# Altium PCB PCB_test.PcbDoc
Units mm, origin at the board's own origin, x right, y up, seen from the top; angles counter-clockwise.
Board outline 70.5 x 46.6 mm, 2 copper layers (Top Layer, Bottom Layer), stack 1.171 mm thick; 66 components, 46 nets, 270 pads, 169 vias.
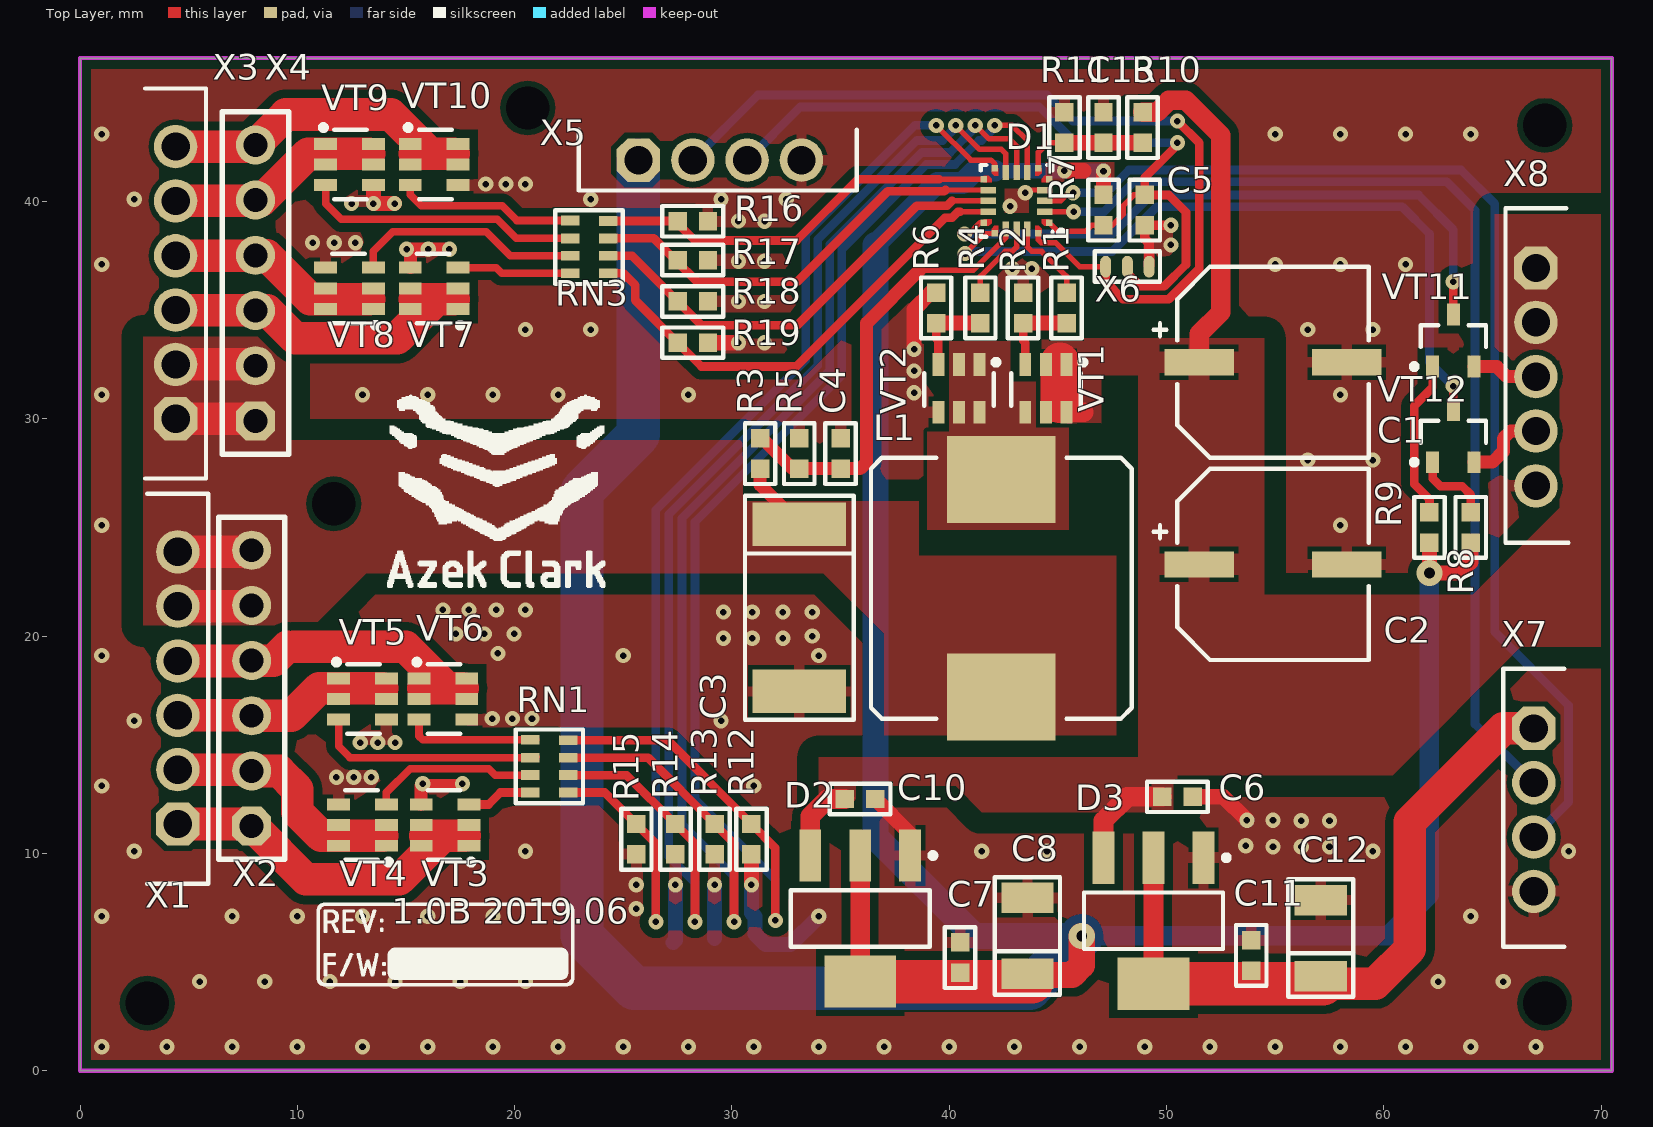
[diagram p0: Top Layer view]
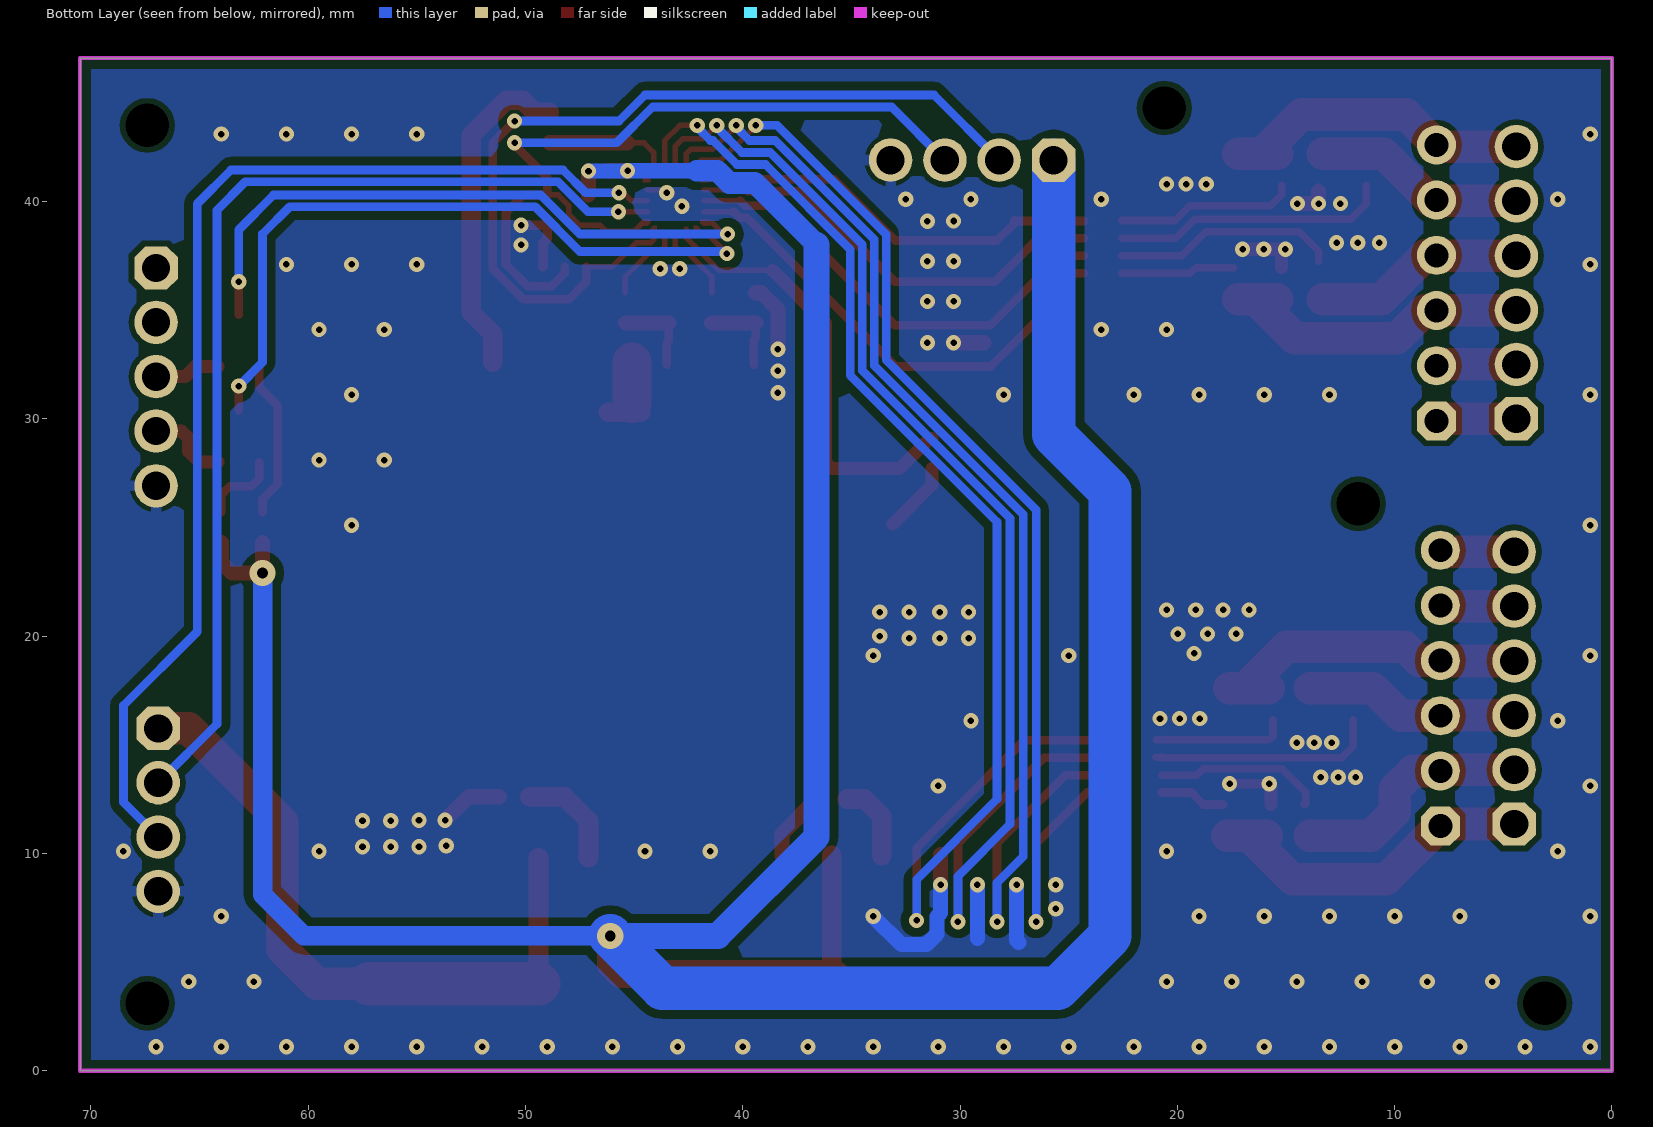
[diagram p1: Bottom Layer view, seen from below]

## Layer stack, top to bottom
Top Solder: solder mask 0.0102, Solder Resist, Dk 3.5
Top Layer: signal copper 0.0356
Dielectric 1: dielectric 1.1, FR-4, Dk 4.8
Bottom Layer: signal copper 0.0356
Bottom Solder: solder mask 0.0102, Solder Resist, Dk 3.5

## Board outline
0,0 70.5,0 70.5,46.6 0,46.6

## Design rules (kind name [scope] priority, off if disabled: settings)
BoardOutlineClearance [All] p1: gap=0.3 ignorepadtopadclearanceinfootprint=FALSE
Clearance Clearance_2 [InNamedPolygon('TOP_VCC33')] p1: gap=0.2 ignorepadtopadclearanceinfootprint=FALSE
Clearance Clearance_1 [InNamedPolygon('TOP_LED_VT')] p2: gap=0.2 ignorepadtopadclearanceinfootprint=FALSE
Clearance Clearance_NPTH [All vs InPadClass('NPTH')] p3: gap=0.4 ignorepadtopadclearanceinfootprint=FALSE except(0: Arc-Hole Track-Hole SMDPad-Hole THPad-Hole Via-Hole Fill-Hole Poly-Hole Region-Hole Text-Hole)
Clearance Clearance_MultiLayerPad [OnLayer('Multi-Layer') and IsPad] p4: gap=0.25 ignorepadtopadclearanceinfootprint=FALSE except(0: Arc-Hole Track-Hole SMDPad-Hole THPad-Hole Via-Hole Fill-Hole Poly-Hole Region-Hole Text-Hole)
Clearance Clearance_Polygon [InPolygon] p5: gap=0.4 ignorepadtopadclearanceinfootprint=FALSE except(0: Arc-Hole Track-Hole SMDPad-Hole THPad-Hole Via-Hole Fill-Hole Poly-Hole Region-Hole Text-Hole; 1: Poly-Poly)
Clearance [All] p6: gap=0.15 ignorepadtopadclearanceinfootprint=FALSE except(0: Arc-Hole Track-Hole SMDPad-Hole THPad-Hole Via-Hole Fill-Hole Poly-Hole Region-Hole Text-Hole)
Height [All] p1: minheight=0 maxheight=60 prefheight=12.7
HoleSize [All] p1: absolutevalues=TRUE maxlimit=5 minlimit=0.025 maxpercent=80.000 minpercent=20.000
HoleToHoleClearance [All] p1: gap=0.2 allowstackedmicrovias=TRUE
MinimumSolderMaskSliver [All] p1: minsoldermaskwidth=0.05
PlaneClearance [All] p1: clearance=0.5
PlaneConnect [All] p1: planeconnectstyle=Relief reliefexpansion=0.5 reliefentries=4 reliefconductorwidth=0.3 reliefairgap=0.2
PolygonConnect PolygonConnect_5 [All vs IsNamedPolygon('TOP_LED_VCC')] p1: thpad.connectstyle=Direct thpad.reliefconductorwidth=0.254 thpad.reliefentries=4 thpad.polygonreliefangle="90 Angle" thpad.airgapwidth=0.254 smdpad.connectstyle=Direct smdpad.reliefconductorwidth=0.254 smdpad.reliefentries=4 smdpad.polygonreliefangle="90 Angle" smdpad.airgapwidth=0.254 via.connectstyle=NoConnect via.reliefconductorwidth=0.254 via.reliefentries=4 via.polygonreliefangle="90 Angle" via.airgapwidth=0.254
PolygonConnect PolygonConnect_3 [All vs IsNamedPolygon('TOP_VCC33')] p2: thpad.connectstyle=Relief thpad.reliefconductorwidth=1.5 thpad.reliefentries=4 thpad.polygonreliefangle="90 Angle" thpad.airgapwidth=0.3 smdpad.connectstyle=Direct smdpad.reliefconductorwidth=0.254 smdpad.reliefentries=4 smdpad.polygonreliefangle="90 Angle" smdpad.airgapwidth=0.254 via.connectstyle=Direct via.reliefconductorwidth=0.254 via.reliefentries=4 via.polygonreliefangle="90 Angle" via.airgapwidth=0.254
PolygonConnect PolygonConnect_2 [All vs IsNamedPolygon('TOP_LED_VT')] p3: thpad.connectstyle=NoConnect thpad.reliefconductorwidth=0.254 thpad.reliefentries=4 thpad.polygonreliefangle="90 Angle" thpad.airgapwidth=0.254 smdpad.connectstyle=Direct smdpad.reliefconductorwidth=0.254 smdpad.reliefentries=4 smdpad.polygonreliefangle="90 Angle" smdpad.airgapwidth=0.254 via.connectstyle=Relief via.reliefconductorwidth=0.254 via.reliefentries=4 via.polygonreliefangle="90 Angle" via.airgapwidth=0.254
PolygonConnect PolygonConnect_1 [All vs IsNamedPolygon('TOP_VCCIN')] p4: thpad.connectstyle=Direct thpad.reliefconductorwidth=0.254 thpad.reliefentries=4 thpad.polygonreliefangle="90 Angle" thpad.airgapwidth=0.254 smdpad.connectstyle=Relief smdpad.reliefconductorwidth=1 smdpad.reliefentries=4 smdpad.polygonreliefangle="90 Angle" smdpad.airgapwidth=0.2 via.connectstyle=Relief via.reliefconductorwidth=1 via.reliefentries=4 via.polygonreliefangle="90 Angle" via.airgapwidth=0.2
PolygonConnect PolygonConnect_PowerPAD [All vs InPadClass('PowerPAD')] p5: connectstyle=Relief reliefconductorwidth=1 reliefentries=4 polygonreliefangle="90 Angle" airgapwidth=0.3
PolygonConnect PolygonConnect_PadGND [InNet('GND') and IsPad] p6: connectstyle=Relief reliefconductorwidth=0.5 reliefentries=4 polygonreliefangle="90 Angle" airgapwidth=0.2
PolygonConnect PolygonConnect_Via [IsVia] p7: connectstyle=Direct reliefconductorwidth=0.254 reliefentries=4 polygonreliefangle="90 Angle" airgapwidth=0.254
PolygonConnect [All] p8: connectstyle=Relief reliefconductorwidth=0.6 reliefentries=4 polygonreliefangle="90 Angle" airgapwidth=0.3
RoutingVias [All] p1: holewidth=0.3 width=0.7 viastyle="Through Hole" minholewidth=0.3 minwidth=0.7 maxholewidth=0.5 maxwidth=1.2
SilkToSilkClearance [All] p1: silktosilkclearance=0
SilkToSolderMaskClearance [IsPad] p1: minsilkscreentomaskgap=0.05 clearancetoexposedcopper=TRUE
SolderMaskExpansion [All] p1: expansion=0.075
Width [All] p1: maxlimit=10 minlimit=0.15 preferedwidth=0.15
22 further rules are at their usual default settings.

## Classes and differential pairs
component class MCU: C5 C6 C7 C8 C10 C11 C12 C13 D1 D2 D3 R7 R8 R9 R10 R11 VT11 VT12 X5 X6 X7 X8
component class "LED Connection": R12 R13 R14 R15 R16 R17 R18 R19 RN1 RN3 VT3 VT4 VT5 VT6 VT7 VT8 VT9 VT10 X1 X2 X3 X4
component class "DC unit": C1 C2 C3 C4 L1 R1 R2 R3 R4 R5 R6 VT1 VT2

## Components (designator, comment, footprint, x,y, rotation, side; value= is the part's Value field where it differs from the comment)
C1 "100µF" D8C3.2H12 54.9,32.6 r0 top
C2 "100µF" D8C3.2H12 54.9,23.3 r0 top
C3 "100µF" TANTAL_D 33.1,21.3 r270 top
C4 "0.1µF" CH0603C 35,28.4 r90 top
C5 "10nF" CH0603C 49,39.6 r90 top
C6 "1µF" CH0603C 50.5,12.6 r180 top
C7 "1µF" CH0603C 40.5,5.2 r270 top
C8 "22µF" TANTAL_B 43.6,6.2 r90 top
C10 "1µF" CH0603C 35.9,12.5 r180 top
C11 "1µF" CH0603C 53.9,5.3 r270 top
C12 "22µF" TANTAL_B 57.1,6.1 r90 top
C13 "0.1µF" CH0603C 47.1,43.4 r90 top
D1 "STM8L151F3U6TR" 20-UFQFPN 43.1,40.025 r180 top
D2 "AMS1117-x.x" SOT223 35.9,7 r270 top
D3 "AMS1117-x.x" SOT223 49.4,6.9 r270 top
Designator1 "Comment" "CON: MF-8MRA" 142.15,14.325 r0 top
Designator5 "Comment" D10C4.4H10 96.725,9.65 r0 top
Designator6 "Comment" "CAP: Alchip™- MVY" 96.825,26.7 r0 top
Designator8 "Comment" D8C3.2H12 81.5,46.6 r0 top
Designator9 "Comment" D6.3C2.5H11 82.3,11.75 r0 top
Designator10 "Comment" "IND: CDRH127" 113.2,9.3 r0 top
Designator11 "Comment" "IND: CDRH127" 113.1,23 r0 top
Designator18 "Comment" CH0603L 117,-1.5 r0 top
Designator19 "Comment" "IND: SCDS127" 113.2,-9.3 r0 top
L1 "150µH" "IND: CDRH127" 42.4,22.2 r90 top
R1 "20" CH0603R 45.4,35.1 r270 top
R2 "10k" CH0603R 43.4,35.1 r270 top
R3 "20k" CH0603R 31.3,28.4 r270 top
R4 "20" CH0603R 41.431,35.1 r270 top
R5 "4k7" CH0603R 33.1,28.4 r270 top
R6 "10k" CH0603R 39.4,35.1 r270 top
R7 "10k" CH0603R 47.1,39.6 r90 top
R8 "1k5" CH0603R 64,25 r270 top
R9 "1k5" CH0603R 62.1,25 r270 top
R10 "18k" CH0603R 48.9,43.4 r90 top
R11 "2k" CH0603R 45.3,43.4 r270 top
R12 "10k" CH0603R 30.9,10.65 r90 top
R13 "10k" CH0603R 29.2,10.65 r90 top
R14 "10k" CH0603R 27.4,10.65 r90 top
R15 "10k" CH0603R 25.6,10.65 r90 top
R16 "10k" CH0603R 28.2,39.088 r180 top
R17 "10k" CH0603R 28.2,37.3 r180 top
R18 "10k" CH0603R 28.2,35.4 r180 top
R19 "10k" CH0603R 28.2,33.5 r180 top
RN1 "22" "CH0603Rx4 (1206)" 21.6,14 r180 top
RN3 "22" "CH0603Rx4 (1206)" 23.425,37.9 r180 top
VT1 "DMN6040SVT-7" TSOT23-6 44.45,31.4 r270 top
VT2 "DMN6040SVT-7" TSOT23-6 40.45,31.4 r270 top
VT3 "DMN6040SVT-7" TSOT23-6 16.8,11.3 r180 top
VT4 "DMN6040SVT-7" TSOT23-6 13,11.3 r180 top
VT5 "DMN6040SVT-7" TSOT23-6 13,17.1 r0 top
VT6 "DMN6040SVT-7" TSOT23-6 16.7,17.1 r0 top
VT7 "DMN6040SVT-7" TSOT23-6 16.3,36 r180 top
VT8 "DMN6040SVT-7" TSOT23-6 12.4,36 r180 top
VT9 "DMN6040SVT-7" TSOT23-6 12.4,41.7 r0 top
VT10 "DMN6040SVT-7" TSOT23-6 16.3,41.7 r0 top
VT11 "BSS138-7-F" SOT23_132 63.2,33.6 r90 top
VT12 "BSS138-7-F" SOT23_132 63.2,29.2 r90 top
X1 "CWF-6RB" "CON: CWF-6RB" 4.5,17.6 r90 top
X2 "*" "CON: PBS-6" 7.9,17.6 r90 top
X3 "CWF-6RB" "CON: CWF-6RB" 4.4,36.25 r90 top
X4 "*" "CON: PBS-6" 8.075,36.25 r90 top
X5 "*" "CON: CWF-4RB" 29.45,41.9 r0 top
X6 "SWIM 3PIN" "CON: 3 PIN 1x1" 48.2,37 r0 top
X7 "CWF-4RB" "CON: CWF-4RB" 66.9,12 r270 top
X8 "CWF-6RB" "CON: CWF-5RB" 67,31.938 r270 top

## Footprints (in the part's own frame and the unit in brackets; to place one, negate y for a bottom-side part, rotate by r counter-clockwise, add the part's x,y. Pads: shape width x height; smd on the part's side, far side on the other; paste and mask are expansions set on the pad)
20-UFQFPN [mm] "UFQFPN20  20-lead, 3x3 mm, 0.5 mm pitch"
  rect 0.3x0.3 smd: 1(-1.5,1) 5(-1.5,-1) 6(-1,-1.5) 10(1,-1.5) 11(1.5,-1) 15(1.5,1) 16(1,1.5) 20(-1,1.5)
  rect 0.7x0.3 smd: 2(-1.3,0.5) 3(-1.3,0) 4(-1.3,-0.5) 12(1.3,-0.5) 13(1.3,0) 14(1.3,0.5)
  rect 0.3x0.7 smd: 7(-0.5,-1.3) 8(0,-1.3) 9(0.5,-1.3) 17(0.5,1.3) 18(0,1.3) 19(-0.5,1.3)
  Top Layer region: -1.5,-1.15 -1.5,-1.15 -1.275,-1.15 -1.275,-1.15 -1.15,-1.025 -1.15,-0.85 -1.5,-0.85
  Top Layer region: -1.025,-1.15 -1.15,-1.275 -1.15,-1.5 -1.15,-1.5 -0.85,-1.5 -0.85,-1.15
  Top Layer region: 1.15,-1.5 1.15,-1.5 1.15,-1.275 1.15,-1.275 1.025,-1.15 0.85,-1.15 0.85,-1.5
  Top Layer region: 1.15,-1.025 1.275,-1.15 1.5,-1.15 1.5,-1.15 1.5,-0.85 1.15,-0.85
  Top Layer region: -1.15,1.5 -1.15,1.5 -1.15,1.275 -1.15,1.275 -1.025,1.15 -0.85,1.15 -0.85,1.5
  Top Layer region: -1.15,1.025 -1.275,1.15 -1.5,1.15 -1.5,1.15 -1.5,0.85 -1.15,0.85
  Top Layer region: 1.025,1.15 1.15,1.275 1.15,1.5 1.15,1.5 0.85,1.5 0.85,1.15
  Top Layer region: 1.5,1.15 1.5,1.15 1.275,1.15 1.275,1.15 1.15,1.025 1.15,0.85 1.5,0.85
  Top Layer region: -2.35,0.25
  silkscreen extent -2.15,-1.65 1.65,1.65, body extent -1.55,-1.55 1.55,1.55, height 0.55
"CAP: Alchip™- MVY" [mm]
  rect 4x1.4 smd: 1(-6,0) 2(6,0)
  silkscreen extent -7,-7 7,7, body extent -7.5,-6.85 7.5,6.85, height 14
CH0603C [mm] "Chip Capacitor, 2-Leads, Body 1,53x0,85mm, IPC Medium Density"
  rect 0.85x0.85 smd: 1(-0.7,0) 2(0.7,0)
  silkscreen extent -1.4,-0.7 1.4,0.7, body extent -0.8,-0.4 0.8,0.4, height 0.3
CH0603L [mm]
  rect 0.85x0.85 smd: 1(-0.7,0) 2(0.7,0)
  silkscreen extent -1.4,-0.7 1.4,0.7, body extent -0.8,-0.4 0.8,0.4, height 0.8
CH0603R [mm]
  rect 0.85x0.85 smd: 1(-0.7,0) 2(0.7,0)
  silkscreen extent -1.4,-0.7 1.4,0.7, body extent -0.8,-0.4 0.8,0.4, height 0.44
"CH0603Rx4 (1206)" [mm] "Resistor assembly 0603x4, 0.5mm height"
  rect 0.85x0.45 smd: 1(-0.875,1.2) 2(-0.875,0.4) 3(-0.875,-0.4) 4(-0.875,-1.2) 5(0.875,-1.225) 6(0.875,-0.4) 7(0.875,0.4) 8(0.875,1.2)
  silkscreen extent -1.55,-1.7 1.55,1.7, body extent -0.75,-1.6 0.75,1.6, height 0.51
"CON: 3 PIN 1x1" [mm] "3 PIN, 1mm oval, 1mm pitch"
  oval 0.5x1 smd: 1(-1,0) 2(0,0) 3(1,0)
  silkscreen extent -1.5,-0.7 1.5,0.7
"CON: CWF-4RB" [mm] "XH2.54 4 pin, angled"
  oct 2x2 hole 1.3: 1(-3.75,0)
  round 2 hole 1.3: 2(-1.25,0) 3(1.25,0) 4(3.75,0)
  round 0.5 on Mech1: 30(-5.9,0)
  silkscreen extent -6.5,-1.4 6.3,1.4, body extent -6.3,-0.4 6.1,7.4, height 5.75
"CON: CWF-5RB" [mm] "XH2.54 5 pin, angled"
  oct 2x2 hole 1.3: 1(-5,0)
  round 2 hole 1.3: 2(-2.5,0) 3(0,0) 4(2.5,0) 5(5.025,0)
  round 0.5 on Mech1: 30(-7.15,0)
  silkscreen extent -7.75,-1.4 7.65,1.5, body extent -7.5,-0.4 7.4,7.4, height 5.75
"CON: CWF-6RB" [mm] "XH2.54 6 pin, angled"
  oct 2x2 hole 1.3: 1(-6.25,0)
  round 2 hole 1.3: 2(-3.75,0) 3(-1.25,0) 4(1.25,0) 5(3.775,0) 6(6.275,0)
  round 0.5 on Mech1: 30(-8.4,0)
  silkscreen extent -9,-1.4 8.95,1.4, body extent -8.75,-0.4 8.65,7.4, height 5.75
"CON: MF-8MRA" [mm] "Mini–Fit, 4.2mm pitch,"
  round 3 hole 3: 0(-6.3,-10.05) 0(6.3,-10.05)
  round 3.5 hole 2: 1(-6.3,-2.75) 2(-2.1,-2.75) 3(2.1,-2.75) 4(6.3,-2.75) 5(-6.3,2.75) 6(-2.1,2.75) 7(2.1,2.75) 8(6.3,2.75)
  silkscreen extent -9.8,-12.85 9.8,5.25, body extent -9,-16.45 9,3.36, height 11.33
"CON: PBS-6" [mm] "PBS-6"
  oct 1.8x1.8 hole 1.1: 1(-6.35,0)
  round 1.8 hole 1.1: 2(-3.81,0) 3(-1.27,0) 4(1.27,0) 5(3.81,0) 6(6.35,0)
  silkscreen extent -7.87,-1.52 7.87,1.52
D6.3C2.5H11 [mm] "Polar capacitor, diameter 6.3 mm, leads clearance 2.5 mm, height 11 mm"
  oct 1.4x1.4 hole 0.8: 1(-1.25,0)
  round 1.4 hole 0.8: 2(1.25,0)
  silkscreen extent -3.2,-3.2 3.2,3.2, body extent -3.4,-3.4 3.4,3.4, height 12.5
D8C3.2H12 [mm]
  rect 3.2x1.2 smd: 1(-3.4,0) 2(3.4,0)
  round 0.5 on Mech1: ""(-4.3,-3.7)
  silkscreen extent -5.5,-4.4 4.4,4.4, body extent -4.85,-4.25 4.85,4.25, height 10.5
D10C4.4H10 [mm]
  rect 4.4x1.2 smd: 1(-4.5,0) 2(4.5,0)
  silkscreen extent -6.5,-5.4 5.4,5.4, body extent -5.9,-5.25 5.9,5.25, height 10.5
"IND: CDRH127" [mm]
  rect 4x5 smd: 1(-5,0) 2(5,0)
  silkscreen extent -6,-6 6,6, body extent -6,-6 6,6, height 8.05
"IND: SCDS127" [mm] "12.5x12.5mm"
  rect 4x5.4 smd: 1(-5.5,0) 2(5.5,0)
  silkscreen extent -6.5,-6.3 6.5,6.3, body extent -6,-6 6,6, height 8.05
SOT23_132 [mm] "SOT23, 3-Leads, Body 3,0x2,6mm (max), Pitch 0,95mm, IPC Medium Density"
  rect 1x0.6 smd: 1(-1.2,0.95) 2(-1.2,-0.95) 3(1.2,0)
  round 0.5 on Mech1: ""(-0.9,1.1)
  silkscreen extent -1.32,-1.5 0.7,1.92, body extent -1.32,-1.52 1.32,1.52, height 1.12
SOT223 [mm] "SOT223, 4-Leads, Body 6,50x7,00mm (avg), Pitch 2,30mm, IPC Medium Density"
  rect 2.4x1 smd: 1(-2.9,2.3) 2(-2.9,0) 3(-2.9,-2.3)
  rect 2.4x3.3 smd: 4(2.9,0)
  round 0.5 on Mech1: ""(-3,2.7)
  silkscreen extent -3.02,-3.2 1.3,3.48, body extent -3.48,-3.25 3.48,3.25, height 1.65
TANTAL_B [mm]
  rect 1.4x2.4 smd: 1(-1.75,0) 2(1.75,0)
  round 0.5 on Mech1: ""(-1.4,1)
  silkscreen extent -2.7,-1.5 2.7,1.5, body extent -1.85,-1.46 1.85,1.47, height 2.03
TANTAL_D [mm]
  rect 2x4.3 smd: 1(-3.85,0) 2(3.85,0)
  round 0.5 on Mech1: ""(-3.1,1.8)
  silkscreen extent -5.15,-2.5 5.15,2.5, body extent -3.7,-2.22 3.7,2.23, height 3.01
TSOT23-6 [mm] "TSOT23, 6-Leads, Body 2,90x1,75mm, Pitch 0,9mm"
  rect 1.05x0.55 smd: 1(-1.1,0.95) 2(-1.1,0) 3(-1.1,-0.95) 4(1.1,-0.95) 5(1.1,0) 6(1.1,0.95)
  round 0.5 on Mech1: ""(-1,1.1)
  silkscreen extent -1.32,-1.6 0.8,1.83, body extent -1.41,-1.5 1.4,1.5, height 0.86

## Part data
C1 C2: library part AlumCap
C3: library part TantalCap, Manufacturer="Vishay Intertechnology Inc.", ComponentKind=20V, HelpURL=https://www.terraelectronica.ru/product/579425, Model=TPSD107K020R0085
C4 C5 C13: library part Capacitor
C6 C7 C10 C11: library part Capacitor, Manufacturer="Murata Electronics Inc.", ComponentKind=X5R, HelpURL=https://www.terraelectronica.ru/product/2094261, Model=GRM188R71C105KE15D
C8 C12: library part TantalCap
D1: "STM8", Manufacturer="ST Microelectronics", ComponentKind=UFQFPN20, HelpURL=https://ru.mouser.com/ProductDetail/STMicroelectronics/STM8L151F3U6TR?qs=%2fha2pyFadujNatApb6mgzz%2fJ8pBCuKMdXUiFB4BdrxFB7btRjiLFjw%3d%3d, Model=STM8L151F3U6TR
D2 D3: "Step-down", Manufacturer="Advanced Monolithic Systems", ComponentKind=SOT-223, HelpURL=http://www.advanced-monolithic.com/pdf/ds1117.pdf, Model=AMS11117-X.X
L1: library part Inductor, Manufacturer="Sumida Electric", ComponentKind=3.5À, HelpURL=https://www.terraelectronica.ru/product/231334, Model=CDRH127/LDNP-390MC
R1 R2 R3 R4 R5 R6 R7 R8 R9 R10 R11 R12 R13 R14 R15 R16 R17 R18 R19: library part Resistor
  R3 R5 R10 R11: ComponentKind=±1%
RN1 RN3: library part "Resistor assembly", Manufacturer="Bourns GmbH.", HelpURL=https://www.terraelectronica.ru/pdf/show?pdf_file=https%253A%252F%252Fwww.mouser.com%252Fds%252F2%252F54%252FATCAY-777361.pdf, Model=CAT16-J4
VT1 VT2 VT3 VT4 VT5 VT6 VT7 VT8 VT9 VT10: "Mosfet", Manufacturer="Diodes Incorporated", ComponentKind="60V 5A", HelpURL=https://www.diodes.com/assets/Datasheets/DMN6040SVT.pdf, Model=DMN6040SVT-7
VT11 VT12: library part N-chanel, "Mosfet", Manufacturer="Diodes Incorporated", ComponentKind="0.2À, 50Â", HelpURL=https://static.chipdip.ru/lib/333/DOC003333982.pdf, Model=BSS138-7-F
X1 X2 X3 X4: library part 6-Connector
  X1 X3: Model=CWF-6RB
X5 X7: library part 4-Connector
  X7: Model=CWF-4RB
X6: library part 3-Connector, Model="SWIM 3PIN"
X8: library part 5-Connector, Model=CWF-6RB

## Free pads (board coordinates)
  round 0.2 hole 2 unplated: 2(3.1,3.103) 2(11.675,26.082) 2(20.6,44.3) 2(67.397,3.1) 2(67.4,43.497)

## Via types
v1: diameter 0.7, hole 0.3, Top Layer to Bottom Layer, tented both sides, 167 vias
v2: diameter 1.2, hole 0.5, Top Layer to Bottom Layer, tented both sides, 2 vias

## Nets (pads, with @x,y where several pads share a name; then routed paths per layer and width w, separated by ;. In a path a pad name is that pad's centre, name@x,y a point inside that pad or via, vN(x,y) a via of type N, cw(c..) or ccw(c..) an arc to the next point about the centre after c; other vN are vias at no path point)
ADC_VIN: C13.1 D1.6 R10.1 R11.2 | length 5.7
  Top Layer w0.25: D1.6 44.1,42.263 44.538,42.7 R11.2
  Top Layer w0.7: R11.2 C13.1 ; C13.1 R10.1
DCDC_ADC_VFB: C4.1 D1.17 R3.1 R5.2 | length 20.4
  Top Layer w0.25: 38.625,36.825 41.1,36.825 42.6,38.325 D1.17
  Top Layer w0.6: R3.1 31.386,29.1 32.786,27.7 R5.2 C4.1 35.9,27.7 36.2,28 36.2,34.4 38.625,36.825
DCDC_PWM_HS: D1.19 R1.1 | length 3.7
  Top Layer w0.25: D1.19@43.6,38.5 43.6,37.9 43.8,37.7 44.25,37.7 45.4,36.55 R1.1
DCDC_PWM_LS: D1.18 R4.1 | length 3.6
  Top Layer w0.25: R4.1 41.431,36.551 42.58,37.7 42.9,37.7 43.1,37.9 D1.18@43.1,38.5
GND: C1.2 C2.2 C3.2 C4.2 C5.1 C6.1 C7.1 C8.2 C10.1 C11.1 C12.2 C13.2 D1.4 D2.1 D3.1 R2.1 R5.1 R6.1 R11.1 R12.1 R13.1 R14.1 R15.1 R16.1 R17.1 R18.1 R19.1 VT2.4 VT3.4 VT4.4 VT5.4 VT6.4 VT7.4 VT8.4 VT9.4 VT10.4 X5.4 X6.3 X7.4 X8.5 | length 34.7
  Top Layer w0.25: v1(43.5,40.4) 43.625,40.525 D1.4
  Top Layer w0.45: v1(15.775,13.2) v1(17.6,13.2) ; X6.3 49.2,38.075 49,38.275 C5.1 v1(50.2,38.9)
  Top Layer w0.6: VT7.4 15.2,37.625 v1(15.025,37.8) v1(16.025,37.8) v1(17,37.8) ; VT3.4 15.7,13.125 v1(15.775,13.2)
  Top Layer w0.7: 13.5,40.475 v1(13.5,39.9) v1(14.475,39.9) ; R19.1 v1(30.3,33.5) ; v1(30.9,8.55) R12.1 ; C10.1 38.2,10.9 D2.1 ; v1(38.38,33.2) 38.38,35.03 39.15,35.8 R6.1 ; C6.1 52.626,12.6 v1(53.7,11.526)
  Bottom Layer w0.7: 27.3,5.9 27.4,6 v1(27.4,8.55) ; 29.2,6.094 v1(29.2,8.55) ; v1(30.9,8.55) 30.9,7.252 31.064,7.088 31.064,6.284 31.548,5.8 32.7,5.8 v1(34,7.1)
  other v1: 1,1.1 4,1.1 7,1.1 10,1.1 13,1.1 16,1.1 19,1.1 22,1.1 25,1.1 28,1.1 31,1.1 34,1.1 37,1.1 40,1.1 43,1.1 46,1.1 49,1.1 52,1.1 55,1.1 58,1.1 61,1.1 64,1.1 67,1.1 5.5,4.1 8.5,4.1 11.5,4.1 14.5,4.1 17.5,4.1 20.5,4.1 62.5,4.1 65.5,4.1 1,7.1 7,7.1 10,7.1 13,7.1 16,7.1 19,7.1 64,7.1 25.6,7.45 25.6,8.55 2.5,10.1 20.5,10.1 41.5,10.1 44.5,10.1 59.5,10.1 68.5,10.1 54.9,10.3 56.2,10.3 57.5,10.3 53.65,10.35 56.2,11.5 57.5,11.5 54.9,11.526 1,13.1 31,13.1 11.8,13.5 12.6,13.5 13.4,13.5 12.9,15.1 13.7,15.1 14.5,15.1 2.5,16.1 29.5,16.1 18.975,16.2 19.9,16.2 20.8,16.2 1,19.1 25,19.1 34,19.1 19.233,19.2 29.608,19.9 30.94,19.9 32.344,19.9 33.7,20 17.3,20.1 18.61,20.1 19.977,20.1 29.608,21.1 30.94,21.1 32.344,21.1 33.7,21.1 16.7,21.2 17.9,21.2 19.15,21.2 20.5,21.2 1,25.1 58,25.1 56.5,28.1 59.5,28.1 1,31.1 13,31.1 16,31.1 19,31.1 22,31.1 28,31.1 58,31.1 38.38,31.2 38.38,32.2 31.5,33.5 20.5,34.1 23.5,34.1 56.5,34.1 59.5,34.1 30.3,35.4 31.5,35.4 42.9,36.9 43.8,36.9 1,37.1 55,37.1 58,37.1 61,37.1 30.3,37.25 31.5,37.25 50.2,38 10.7,38.1 11.7,38.1 12.675,38.1 31.5,39.088 30.3,39.1 42.8,39.775 12.5,39.9 2.5,40.1 23.5,40.1 29.5,40.1 32.5,40.1 18.675,40.8 19.6,40.8 20.5,40.8 1,43.1 55,43.1 58,43.1 61,43.1 64,43.1
I2C_IN_SCL: VT12.2 X8.4 | length 3.8
  Top Layer w0.6: VT12.2 65,28 65.5,28.5 65.5,29.1 65.838,29.438 X8.4
I2C_IN_SDA: VT11.2 X8.3 | length 3
  Top Layer w0.6: VT11.2 65.2,32.4 65.663,31.937 X8.3
NetL1_2: L1.2 VT1.4 VT2.1 VT2.2 VT2.5 VT2.6
NetR1_2: R1.2 R2.2 VT1.3 | length 3.9
  Top Layer w0.4: R2.2 43.4,33.6 43.5,33.5 VT1.3
  Top Layer w0.7: R2.2 R1.2
NetR4_2: R4.2 R6.2 VT2.3 | length 4
  Top Layer w0.4: R6.2 39.4,33.7 39.5,33.6 VT2.3
  Top Layer w0.7: R6.2 R4.2
NetR8_1: R8.1 VT12.1 | length 3.6
  Top Layer w0.4: VT12.1 62.25,27.25 62.6,26.9 63.6,26.9 64,26.5 R8.1
NetR9_1: R9.1 VT11.1 | length 7.3
  Top Layer w0.4: R9.1 62.1,26.3 61.4,27 61.4,30.6 62.25,31.45 VT11.1
NetRN1_5: RN1.5 VT6.3 | length 6.2
  Top Layer w0.35: VT6.3 15.6,15.4 15.775,15.225 RN1.5@20.975,15.225 ; RN1.5@20.675,15.225 RN1.5@20.7,15.25
NetRN1_6: RN1.6 VT5.3 | length 10.6
  Top Layer w0.35: VT5.3 11.9,14.925 12.425,14.4 RN1.6 ; RN1.6@20.7,14.425 RN1.6@21,14.425
NetRN1_7: RN1.7 VT4.3 | length 7.8
  Top Layer w0.35: VT4.3@14.19,12.25 VT4.3 14.1,12.8 15.2,13.9 18.8,13.9 19.1,13.6 RN1.7
NetRN1_8: RN1.8 VT3.3 | length 3.1
  Top Layer w0.4: VT3.3 18.8,12.25 19.35,12.8 RN1.8
NetRN3_5: RN3.5 VT10.3 | length 8.3
  Top Layer w0.35: VT10.3 15.2,40.3 15.7,39.8 19.425,39.8 20.1,39.125 RN3.5
NetRN3_6: RN3.6 VT9.3 | length 12.8
  Top Layer w0.35: VT9.3 11.3,39.9 12.025,39.175 19.2,39.175 20.075,38.3 RN3.6
NetRN3_7: RN3.7 VT8.3 | length 10.3
  Top Layer w0.35: 13.5,37.25 13.5,37.7 14.4,38.6 18.7,38.6 19.8,37.5 RN3.7
NetRN3_8: RN3.8 VT7.3 | length 5.3
  Top Layer w0.35: VT7.3 19.15,36.95 19.4,36.7 RN3.8
NetVT3_1: VT3.1 VT3.2 VT3.5 VT3.6 X1.1 X2.1 | length 15.9
  Top Layer w1.5: X1.1 7.8,11.35 X2.1 7.95,11.25 10.4,8.8 14.7,8.8 16.7,10.8 ; 15.9,10.8 16.7,10.8 ; 17.7,10.8 16.7,10.8
NetVT4_1: VT4.1 VT4.2 VT4.5 VT4.6 X1.2 X2.2 | length 11.3
  Top Layer w1.5: X1.2 7.84,13.85 X2.2 9.16,13.79 10,12.95 10,11.9 11.1,10.8 13.9,10.8
NetVT5_1: VT5.1 VT5.2 VT5.5 VT5.6 X1.3 X2.3 | length 9.9
  Top Layer w1.5: X1.3 7.88,16.35 X2.3 9.73,16.33 11,17.6 13.9,17.6
NetVT6_1: VT6.1 VT6.2 VT6.5 VT6.6 X1.4 X2.4 | length 14.9
  Top Layer w1.5: X1.4 7.88,18.85 X2.4 8.9,18.87 9.53,19.5 ; 9.83,19.5 14.99,19.5 16.89,17.6 ; 15.8,17.6 16.89,17.6 ; 17.6,17.6 16.89,17.6
NetVT7_1: VT7.1 VT7.2 VT7.5 VT7.6 X3.3 X4.3 | length 15.1
  Top Layer w1.5: X3.3 8.055,35 X4.3 8.62,34.98 9.9,33.7 14.6,33.7 16.4,35.5 ; 15.4,35.5 16.4,35.5 ; 17.2,35.5 16.4,35.5
NetVT8_1: VT8.1 VT8.2 VT8.5 VT8.6 X3.4 X4.4 | length 9.7
  Top Layer w1.5: X3.4 8.055,37.5 X4.4 8.58,37.52 10.6,35.5 13.3,35.5
NetVT9_1: VT9.1 VT9.2 VT9.5 VT9.6 X3.5 X4.5 | length 9.8
  Top Layer w1.5: X3.5 8.04,40.025 X4.5 8.36,40.06 10.5,42.2 13.3,42.2
NetVT10_1: VT10.1 VT10.2 VT10.5 VT10.6 X3.6 X4.6 | length 14.9
  Top Layer w1.5: X3.6 8,42.525 X4.6 9.475,44 14.3,44 16.1,42.2 ; 15.4,42.2 16.1,42.2 ; 17.2,42.2 16.1,42.2
PWM_LED1_BLUE: D1.8 R13.2 RN1.3 | length 60.4
  Top Layer w0.25: v1(41.2,43.5) 41.216,43.5 41.841,42.875 42.775,42.875 43.1,42.55 43.1,42.4 D1.8
  Top Layer w0.4: RN1.3 26.15,14.4 R13.2 30.1,10.45 v1(30.1,6.85)
  Bottom Layer w0.4: v1(30.1,6.85) 30.1,8.95 27.7,11.35 27.7,25.422 34.5,32.222 34.5,38.019 38.731,42.25 40.04,42.25 41.2,43.41 v1(41.2,43.5)
PWM_LED1_GREEN: D1.7 R12.2 RN1.4 | length 62.9
  Top Layer w0.25: v1(42.1,43.5) 42.9,43.5 43.6,42.8 D1.7
  Top Layer w0.4: RN1.4 27.05,15.2 R12.2 32,10.25 v1(32,6.913)
  Bottom Layer w0.4: v1(32,6.913) 32,8.8 28.3,12.5 28.3,25.244 35.05,31.994 35.05,37.792 38.958,41.7 40.268,41.7 41.368,42.8 41.49,42.8 42.1,43.41 v1(42.1,43.5)
PWM_LED1_RED: D1.9 R14.2 RN1.2 | length 57.8
  Top Layer w0.25: v1(40.3,43.5) 41.4,42.4 42.4,42.4 42.6,42.2 D1.9
  Top Layer w0.4: RN1.2 25.15,13.6 R14.2 28.3,10.45 v1(28.3,6.85)
  Bottom Layer w0.4: v1(28.3,6.85) 28.3,8.64 27.1,9.84 27.1,25.6 33.95,32.45 33.95,38.247 38.503,42.8 39.69,42.8 40.3,43.41 v1(40.3,43.5)
PWM_LED1_WW: D1.10 R15.2 RN1.1 | length 54.8
  Top Layer w0.25: v1(39.4,43.5) 41,41.9 41.913,41.9 42.1,41.713 D1.10
  Top Layer w0.4: RN1.1 24.15,12.8 R15.2 26.5,10.45 v1(26.5,6.85)
  Bottom Layer w0.4: v1(26.5,6.85) 26.5,25.8 33.4,32.7 33.4,38.475 38.425,43.5 v1(39.4,43.5)
PWM_LED2_BLUE: D1.12 R17.2 RN3.3 | length 20.1
  Top Layer w0.25: 39.825,40.525 D1.12
  Top Layer w0.4: RN3.3 26.4,38.3 27.4,37.3 28.4,36.3 33,36.3 37.175,40.475 39.775,40.475 39.825,40.525
PWM_LED2_GREEN: D1.11 R16.2 RN3.4 | length 18.9
  Top Layer w0.25: 39.547,41.025 D1.11
  Top Layer w0.4: RN3.4 27.475,39.1 R16.2@27.5,39.125 ; R16.2 27.5,39 28.3,38.2 32.975,38.2 35.8,41.025 39.547,41.025
PWM_LED2_RED: D1.13 R18.2 RN3.2 | length 21.2
  Top Layer w0.25: 40.125,40.025 D1.13
  Top Layer w0.4: RN3.2 25.4,37.5 R18.2 28.6,34.3 33,34.3 38.5,39.8 39.9,39.8 40.125,40.025
PWM_LED2_WW: D1.14 R19.2 RN3.1 | length 22.6
  Top Layer w0.25: 40.5,39.525 D1.14
  Top Layer w0.4: RN3.1 25,36.7 25.55,36.15 25.55,35.45 R19.2 28.6,32.4 32.96,32.4 39.81,39.25 40.128,39.25 40.403,39.525 40.5,39.525
RANGE_ECHO: D1.2 X7.2 | length 48.4
  Top Layer w0.25: D1.2 v1(45.725,39.525)
  Bottom Layer w0.4: v1(45.725,39.525) 47.125,39.525 48.5,40.9 62.9,40.9 64.2,39.6 64.2,15.95 X7.2
RANGE_TRIG: D1.3 X7.3 | length 53.2
  Top Layer w0.25: D1.3 45.125,40.025 45.5,40.4 v1(45.7,40.4)
  Bottom Layer w0.4: v1(45.7,40.4) 47.222,40.4 48.272,41.45 63.55,41.45 65.1,39.9 65.1,20.2 68.5,16.8 68.5,12.35 X7.3
STM8_I2C_SCL: D1.16 VT12.3 | length 33.1
  Top Layer w0.25: v1(40.731,37.6) 41.656,38.525 D1.16
  Top Layer w0.4: VT12.3 v1(63.2,31.5)
  Bottom Layer w0.4: v1(40.731,37.6) 40.831,37.7 47.5,37.7 49.55,39.75 60.85,39.75 62.1,38.5 62.1,32.6 v1(63.2,31.5)
STM8_I2C_SDA: D1.15 VT11.3 | length 28.9
  Top Layer w0.25: v1(40.7,38.5) 40.9,38.5 41.425,39.025 D1.15
  Top Layer w0.4: VT11.3 v1(63.2,36.3)
  Bottom Layer w0.4: v1(40.7,38.5) 47.5,38.5 49.3,40.3 61.6,40.3 63.2,38.7 v1(63.2,36.3)
STM8_RST: C5.2 D1.1 R7.1 X5.3 X6.2 | length 38.3
  Top Layer w0.25: D1.1 44.987,38.638 46.288,38.638 46.55,38.9 R7.1 47.5,38.9 48,39.4 48,39.8 48.5,40.3 C5.2
  Top Layer w0.4: X6.2 48.2,36.7 48.8,36.1 49.9,36.1 50.9,37.1 50.9,39.5 50.1,40.3 C5.2 49,41.1 50.5,42.6 v1(50.5,42.7)
  Bottom Layer w0.4: X5.3 33.15,44.35 44.15,44.35 45.8,42.7 v1(50.5,42.7)
STM8_SWIM: D1.20 X5.2 X6.1 | length 41.1
  Top Layer w0.25: D1.20 44.1,38.225 44.225,38.1 44.9,38.1 46,37 X6.1
  Top Layer w0.4: X6.1 47.2,36.3 48,35.5 50.1,35.5 51.5,36.9 51.5,42.7 v1(50.5,43.7)
  Bottom Layer w0.4: X5.2 31.2,44.9 44.5,44.9 45.7,43.7 v1(50.5,43.7)
VCC5: C11.2 C12.1 D3.2 D3.4 X7.1 | length 31.6
  Top Layer w0.9: D3.4 D3.2
  Top Layer w1.5: C12.1@57.2,4 59.6,4 61.2,5.6 61.2,11.45 65.5,15.75 X7.1
  Top Layer w2: D3.4 C12.1@57.2,4
VCC33: C7.2 C8.1 D1.5 D2.2 D2.4 R7.2 R8.2 R9.2 X5.1 | length 168.1
  Top Layer w0.7: v1(45.3,41.412) 46.194,41.412 ; R7.2 v1(47.1,41.4) ; R9.2 v2(62.1,22.9) 63.5,22.9 64,23.4 R8.2
  Top Layer w0.9: D2.4 D2.2
  Top Layer w1.2: C8.1 43.65,4.4 45.65,4.4 46.1,4.85 v2(46.1,6.2)
  Top Layer w2: D2.4 C8.1@43.8,4.1
  Bottom Layer w0.7: 42.112,41.412 v1(45.3,41.412) 45.312,41.4 v1(47.1,41.4)
  Bottom Layer w0.9: v2(46.1,6.2) 60.2,6.2 62.1,8.1 v2(62.1,22.9)
  Bottom Layer w1: 36.6,37.998 36.6,38 39.45,40.85 40.62,40.85 41.182,41.412 42.112,41.412
  Bottom Layer w1.2: 36.6,37.998 36.6,10.75 41.15,6.2 v2(46.1,6.2)
  Bottom Layer w2: X5.1 25.7,29.275 23.1,26.675 23.1,6.202 25.502,3.8 43.7,3.8 v2(46.1,6.2)
VCCIN: C1.1 C2.1 C6.2 C10.2 D2.3 D3.3 R10.2 VT1.1 VT1.2 VT1.5 VT1.6 X8.1 X8.2 | length 27.3
  Top Layer w0.9: D2.3 33.6,11.7 34.4,12.5 C10.2 ; VT1.5@44.7,30.3 VT1.6 46.2,30.3 ; D3.3 47.1,11.5 48.2,12.6 C6.2 ; R10.2 49.557,44.1 50.106,44.65 50.894,44.65 51.272,44.272 52.5,43.044 52.5,34.9 51.5,33.9 C1.1
  Top Layer w1.8: 45.1,30.7 45.1,32.6
VCCLED: C3.1 L1.1 R3.2 X1.5 X1.6 X2.5 X2.6 X3.1 X3.2 X4.1 X4.2 | length 17.6
  Top Layer w0.6: R3.2 31.3,26.95 C3.1
  Top Layer w1.5: X3.1 7.975,30 X4.1 ; X3.2 8.015,32.5 X4.2 ; X1.5 7.865,21.375 X2.5 ; X1.6 7.825,23.875 X2.6
pads on no net: C1. C2. C3. C8. C12. D2. D3. Designator1.0 Designator1.1 Designator1.2 Designator1.3 Designator1.4 Designator1.5 Designator1.6 Designator1.7 Designator1.8 Designator5.1 Designator5.2 Designator6.1 Designator6.2 Designator8. Designator8.1 Designator8.2 Designator9.1 Designator9.2 Designator10.1 Designator10.2 Designator11.1 Designator11.2 Designator18.1 Designator18.2 Designator19.1 Designator19.2 VT1. VT2. VT3. VT4. VT5. VT6. VT7. VT8. VT9. VT10. VT11. VT12. X1.30 X3.30 X5.30 X7.30 X8.30

## Polygon pours and split planes (outlines as drawn)
GND on Top Layer "TOP_GND" (solid, remove dead copper, pour order 10): 0,46.6 70.5,46.6 70.5,0 0,0
VCCLED on Top Layer "TOP_LED_VCC" (solid, pour order 8): 48.375,14.825 48.4,14.8 37.004,14.8 37.004,20.1 34.204,22.9 13.178,22.9 10.778,20.5 2.904,20.5 2.9,20.504 2.9,33.774 9.505,33.774 9.58,33.699 9.58,29 30.374,29 30.5,28.874 30.5,26.2 38.6,26.2 38.6,23.7 48.375,23.7
VCC33 on Top Layer "TOP_VCC33" (solid, pour order 9): 44.25,40.875 44.25,41.05 44.25,41.8 47.6,41.8 47.6,41.05 45.3,41.05 45.3,40.9 44.275,40.9
NetL1_2 on Top Layer "TOP_LED_VT" (solid, pour order 4): 44.125,31.7 44.125,29.6 45.5,29.6 45.5,24.9 39,24.9 39,29.4 40,29.4 40,33.575 42.775,33.575 42.8,33.6 42.8,31.7
VCCIN on Top Layer "TOP_VCCIN" (solid, pour order 0): 34,12.1 34,14.425 48.7,14.425 48.7,32 47,32 47,29.8 44.25,29.8 44.25,33.7 54.5,33.7 54.5,21.9 64.1,21.9 68.1,25.9 68.1,32.7 65.7,32.7 65.1,33.3 65.1,39.4 70.4,39.4 70.4,38 70.4,19.5 66.3,19.5 60.4,13.6 50.5,13.6 50.5,11.9 41.5,11.9 40.3,13.1 35.9,13.1 35.9,12.1
GND on Bottom Layer "BOTTOM_GND" (solid, remove dead copper, pour order 11): 0,46.6 70.5,46.6 70.5,0 0,0

## Keep-outs
Keep-Out Layer:
  the board outline again, w0.2

## Silkscreen, mask and mechanical layers (free items; w line width, h text height)
Top Overlay:
  drawing of 2033 lines, arcs and shapes, not listed
  text "1.0B 2019.06" at 14.35,6.364 h2